# Altium PCB Mixed Signal Board.PcbDoc (part 2 of 3)
Units mm, origin at the board's own origin, x right, y up, seen from the top; angles counter-clockwise.
Board outline 75 x 70 mm, 4 copper layers (Top Layer, GND, VCC, Bottom Layer), stack 1.565 mm thick; 188 components, 143 nets, 738 pads, 413 vias.
Unrouted connection lines stored in the file: 2.
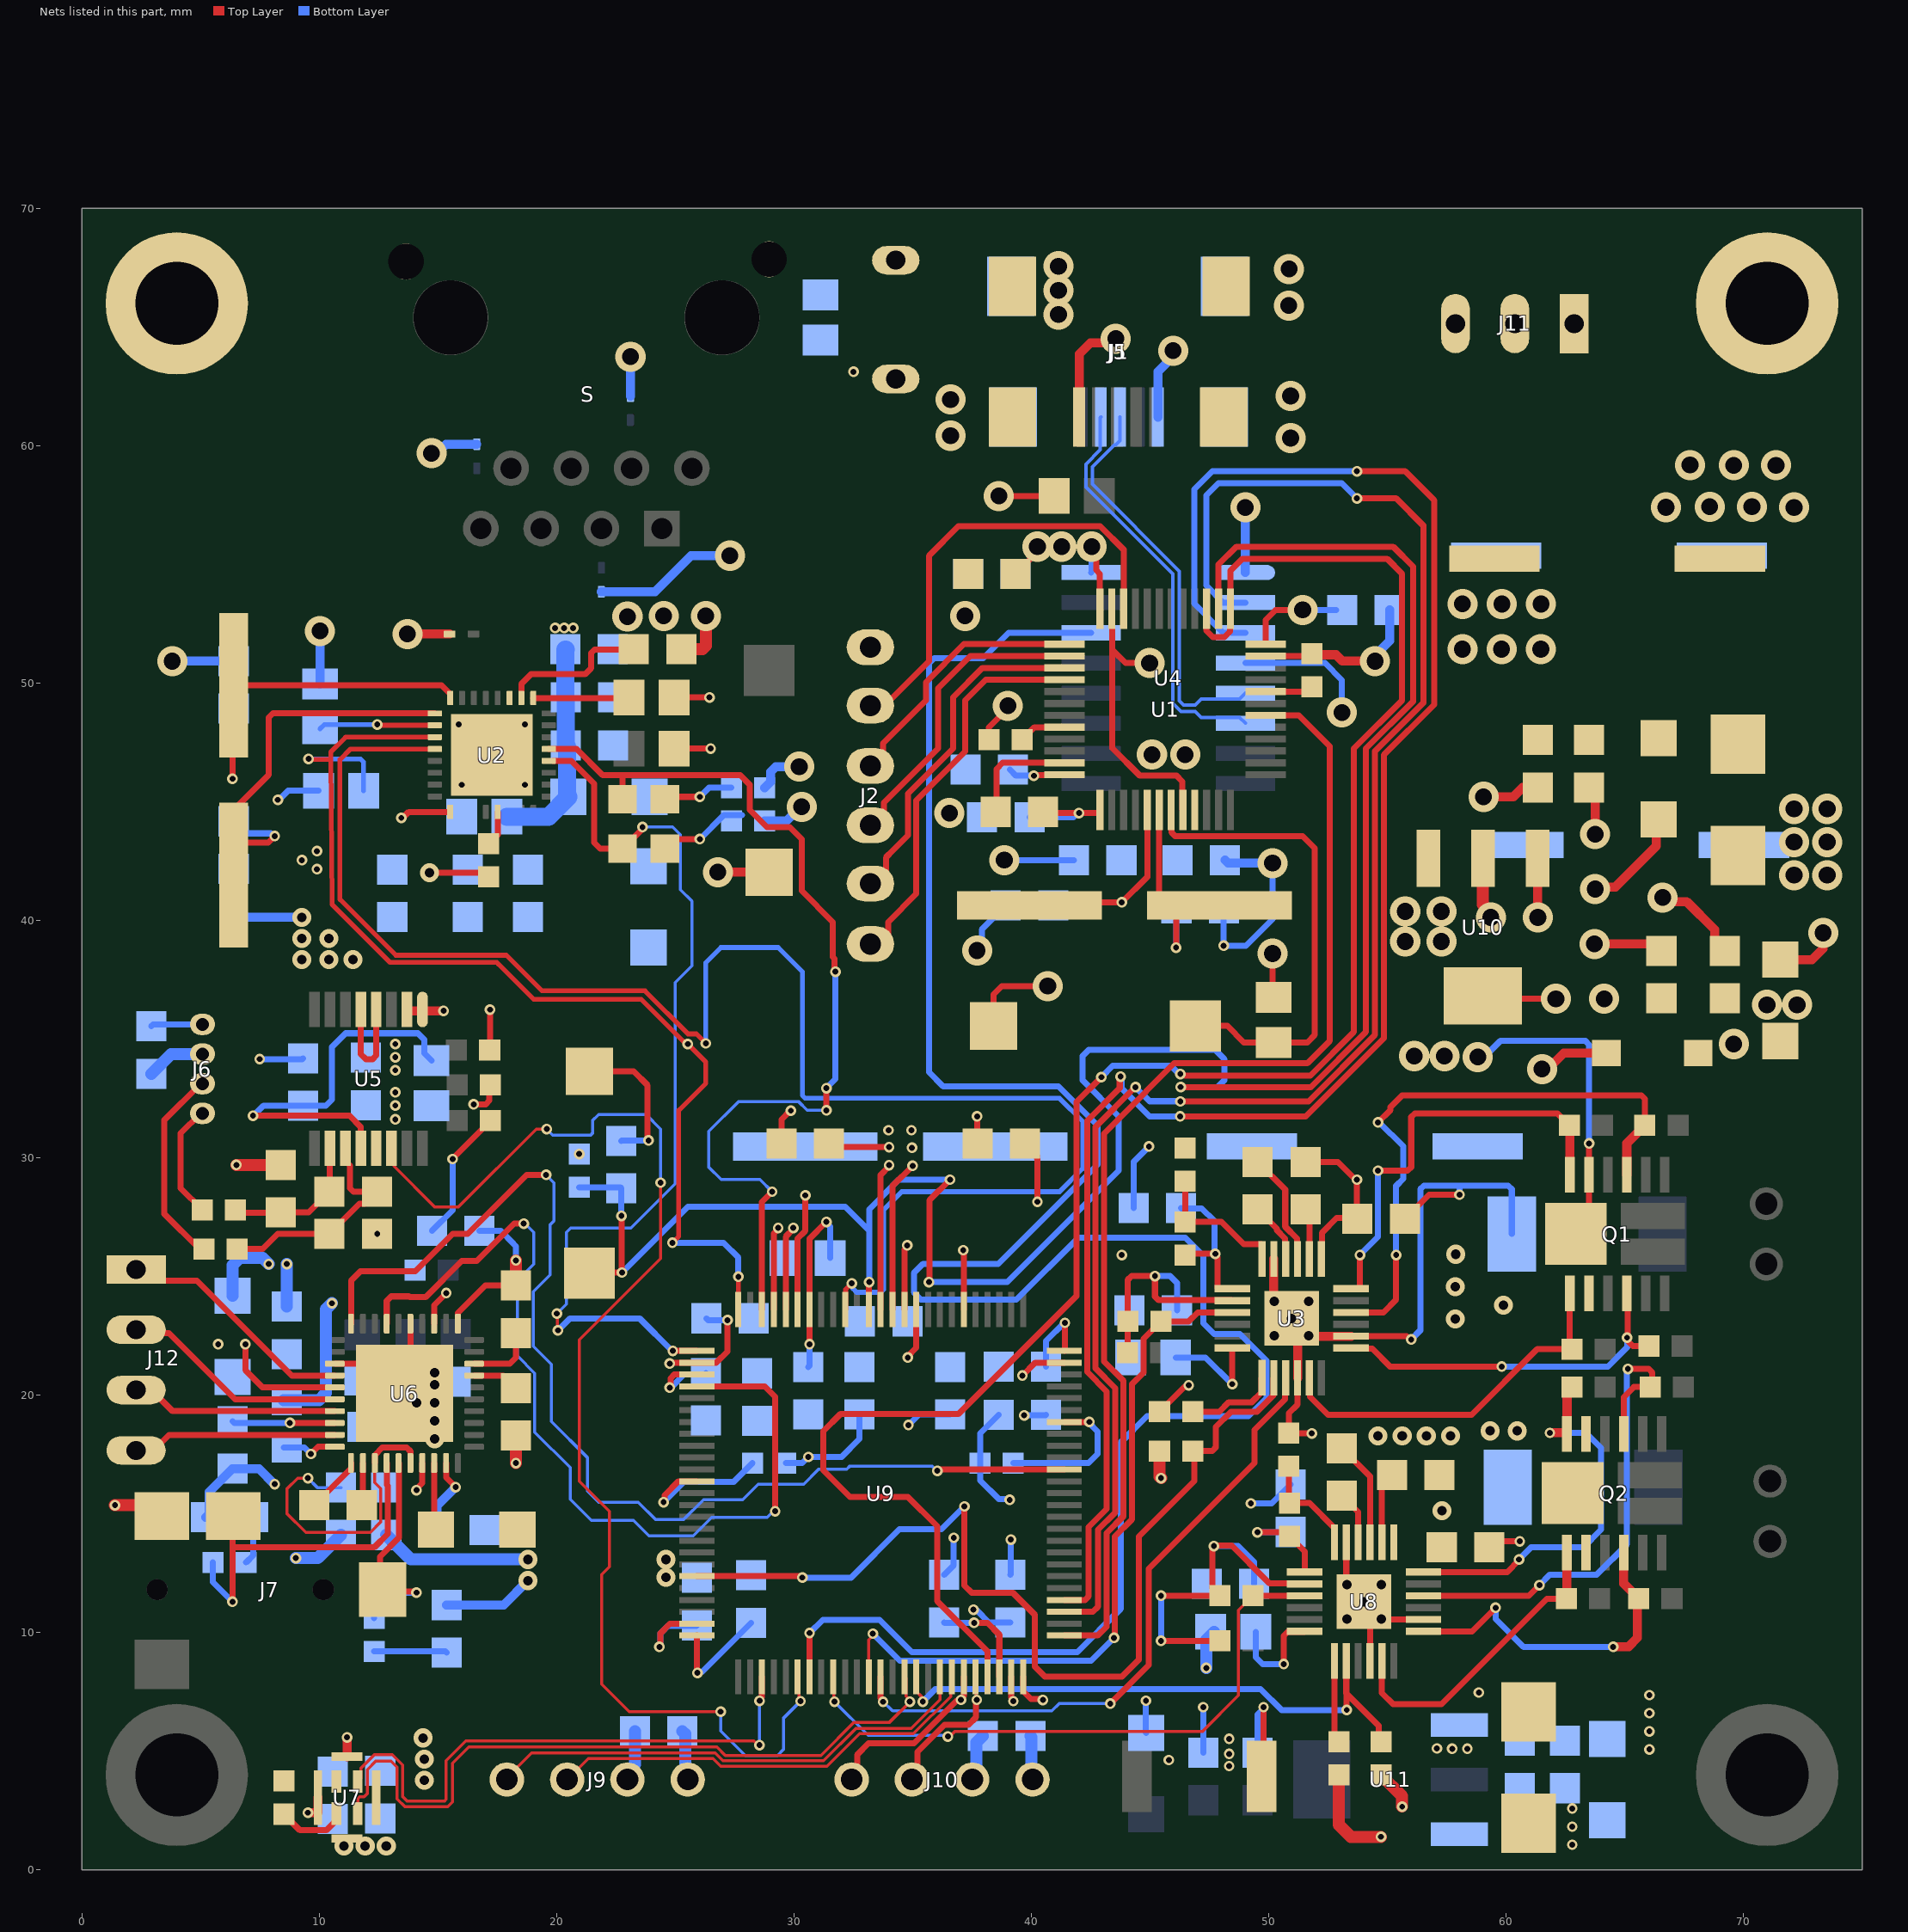
[diagram p4: the nets of this part, all layers, seen from the top]

## Via types
v1: diameter 0.45, hole 0.25, Top Layer to Bottom Layer, 268 vias
v2: diameter 1.27, hole 0.711, Top Layer to Bottom Layer, 82 vias
v3: diameter 0.8, hole 0.4, Top Layer to Bottom Layer, 63 vias

## Nets (pads, with @x,y where several pads share a name; then routed paths per layer and width w, separated by ;. In a path a pad name is that pad's centre, name@x,y a point inside that pad or via, vN(x,y) a via of type N, cw(c..) or ccw(c..) an arc to the next point about the centre after c; other vN are vias at no path point) (continued)
+3V3: C1.2 C2.2 C4.2 C5.2 C7.2 C8.2 C9.2 C16.2 C17.2 C18.2 C19.2 C27.2 C28.2 C33.2 C42.2 C43.2 C44.2 C45.2 C46.1 C47.2 C57.2 C58.2 C60.2 C61.2 C62.2 C63.2 C64.2 C65.2 C72.2 C78.2 C79.2 C80.2 D6.K FB1.1 FB2.1 FB4.1 J6.3 J9.3 J10.3 R1.2 R2.2 R6.2 R8.2 R9.2 R11.2 R21.1 R25.2 R26.2 R27.2 R32.2 R33.1 R42.1 R46.2 U1.1 U1.9 U1.24 U1.36 U1.48 U2.17 U4.4 U4.16 U5.13 U6.5 U6.8 U6.33 U7.1 U9.6 U9.11 U9.19 U9.28 U9.50 U9.75 U9.100 U10.2 U10.4 | length 106.8
  Top Layer w0.254: v1(6.889,22.151) 6.889,21.051 7.61,20.33 U6.5@10.658,20.33 ; v1(8.763,18.836) 8.767,18.832 10.656,18.832 U6.8@10.658,18.83 ; v1(13.462,44.323) 13.515,44.323 13.769,44.577 U2.17@15.519,44.577 ; v3(14.646,42.011) 16.981,42.011 R8.2@17.145,41.846 ; U6.33@14.843,23.015 14.845,23.017 14.845,23.798 v1(15.354,24.308) ; v1(15.621,29.952) 15.621,29.972 16.891,31.242 16.891,31.255 17.196,31.56 R26.2@17.209,31.56 ; v1(16.51,32.258) 17.018,32.258 17.17,32.41 17.17,33.033 R25.2@17.209,33.071 ; R27.2@17.183,34.544 17.196,34.557 v1(17.196,36.246) ; v1(24.765,20.32) 24.803,20.358 24.803,20.717 24.96,20.875 U9.28@25.917,20.875 ; R9.2@24.892,49.403 v1(26.441,49.403) ; R6.2@24.953,47.244 v1(26.492,47.244) ; U9.50@25.917,9.875 25.917,8.322 v1(25.933,8.306) ; v1(30.658,22.149) 30.655,22.152 U9.19@30.655,23.613 30.655,26.594 31.366,27.305 v1(31.369,27.305) ; U9.11@34.655,23.613 34.655,26.144 34.773,26.261 v1(34.773,26.314) ; v1(37.135,26.111) 37.155,26.091 U9.6@37.155,23.613 ; v2(38.633,57.887) R2.2@40.96,57.887 ; C5.2@39.338,54.61 40.259,55.531 v2(40.259,55.753) ; U9.75@39.655,8.137 39.655,7.526 39.981,7.2 40.45,7.2 v1(40.488,7.163) ; v1(40.107,46.101) 40.129,46.123 41.38,46.123 U1.48@41.402,46.145 ; C4.2@40.497,44.577 40.548,44.526 v1(42.012,44.526) 42.867,44.526 42.89,44.549 U1.1@42.89,44.657 ; U9.100@41.393,21.875 41.418,21.875 v1(41.418,23.05) ; v2(42.545,55.753) 42.739,55.559 42.739,54.761 42.89,54.61 U1.36@42.89,53.133 ; R21.1@45.403,19.304 46.483,20.384 46.597,20.384 v1(46.634,20.422) ; U1.24@49.878,51.645 49.878,52.672 50.292,53.086 v2(51.435,53.086) ; v2(50.165,38.608) 50.165,36.811 R1.2@50.212,36.764 ; U10.4@59.03,36.826 59.152,36.703 v2(62.103,36.703)
  Top Layer w0.508: R42.1@52.959,4.001 52.959,1.905 53.467,1.397 v1(54.737,1.397) ; U10.2@59.03,42.626 59.03,40.668 59.36,40.338 v2(59.36,40.132)
  Bottom Layer w0.254: C42.2@6.35,18.907 6.421,18.836 v1(8.763,18.836) ; v1(8.255,45.085) 8.308,45.085 8.689,45.466 R11.2@9.972,45.466 ; C45.2@14.748,26.924 15.621,27.797 v1(15.621,29.952) ; v1(24.765,20.32) 24.817,20.32 25.372,20.875 26.225,20.875 C62.2@26.289,20.939 ; v1(25.933,8.306) 25.971,8.343 26.123,8.343 27.686,9.906 C63.2@28.194,10.414 ; C61.2@30.607,21.193 30.658,21.244 v1(30.658,22.149) ; v1(31.369,27.305) 31.369,27.252 31.521,27.1 FB4.1@31.521,25.781 ; v1(34.823,18.745) 35.271,19.193 C60.2@36.576,19.193 ; v1(37.566,10.963) 37.604,10.926 37.719,10.926 38.215,10.43 C64.2@39.116,10.43 ; C1.2@39.1,46.355 39.354,46.101 v1(40.107,46.101) ; C27.2@39.338,54.61 40.259,55.531 v2(40.259,55.753) ; v1(39.7,19.152) 40.599,19.152 C65.2@40.624,19.177 ; C2.2@39.929,44.348 41.781,44.348 41.959,44.526 v1(42.012,44.526) ; C72.2@40.624,21.209 40.624,22.285 41.389,23.05 v1(41.418,23.05) ; U4.16@42.521,54.661 42.545,54.685 v2(42.545,55.753) ; U4.4@49.021,50.851 52.37,50.851 53.086,50.135 v2(53.086,48.768) ; v2(51.435,53.086) C9.2@52.848,53.086
  Bottom Layer w0.508: C33.2@2.921,33.544 3.754,34.377 J6.3@5.08,34.377 ; J9.3@22.987,3.81 22.987,4.134 23.304,4.451 C57.2@23.304,5.842 ; J10.3@37.512,3.81 37.692,3.99 37.692,5.368 C58.2@37.964,5.639
  other v1: 5.746,22.151 20.955,30.163 13.208,31.623 13.208,32.207 13.208,32.766 9.906,42.164 9.271,42.545 9.906,42.926
  other v2: 69.596,34.798 70.993,36.449 72.263,36.449 64.135,36.703 45.085,46.99 46.482,46.99 41.275,55.753
  other v3: 14.427,3.785 14.427,4.674 14.376,5.563
+12V: C23.2 C24.2 C53.2 C54.2 C75.1 C76.1 C77.1 C90.1 D5.A D7.A J11.1 Q1.2 Q1.11 Q1.15 Q2.2 Q2.11 Q2.15 U3.1 U8.1 | length 20.3
  Top Layer w0.254: C23.2@51.562,29.829 52.922,29.829 53.668,29.083 v1(53.721,29.083) 53.721,27.448 C24.2@53.737,27.432 ; U3.1@52.217,25.737 52.24,25.76 52.24,26.84 52.87,27.47 53.648,27.47 C24.2@53.737,27.559 ; Q1.15@62.94,26.797 63.49,27.347 Q1.11@63.49,29.297 63.495,29.302 63.495,30.602 v1(63.5,30.607)
  Bottom Layer w0.254: v2(58.81,34.253) 59.085,34.253 59.757,34.925 63.351,34.925 63.5,34.776 v1(63.5,30.607)
  other v1: 66.04,5.08 66.04,5.842 66.04,6.604 66.04,7.366
  other v2: 56.134,34.29 57.404,34.29 72.136,41.91 73.533,41.91 72.136,43.307 73.533,43.307 72.136,44.704 73.533,44.704 66.737,57.412 72.136,57.404 68.583,57.436 70.361,57.436 67.753,59.19 69.596,59.182 71.374,59.182
  other v3: 57.302,15.138 54.61,18.288 55.626,18.288 56.642,18.288 57.658,18.288 57.861,23.216 59.893,23.8 57.859,24.568 57.884,25.94
AIN0: J6.2 R28.2 | length 8.5
  Top Layer w0.254: J6.2@5.08,33.127 5.005,33.127 3.48,31.602 3.48,27.635 4.953,26.162 R28.2@5.143,26.162
AIN1: J6.1 R29.2 | length 4.9
  Top Layer w0.254: R29.2@5.08,27.813 4.166,28.727 4.166,31.038 5.005,31.877 J6.1@5.08,31.877
CAN_RX: J10.1 U9.70 | length 7.5
  Top Layer w0.254: J10.1@32.432,3.81 32.661,4.039 32.661,4.848 33.147,5.334 35.059,5.334 36.855,7.13 37.001,7.13 v1(37.039,7.167) 37.039,7.22 37.155,7.337 U9.70@37.155,8.137
CAN_TX: J10.2 U9.71 | length 6.1
  Top Layer w0.127: U9.71@37.655,8.137 37.68,8.112 37.68,7.192 v1(37.704,7.167)
  Top Layer w0.254: J10.2@34.972,3.81 35.201,4.039 35.201,4.975 36.344,6.118 37.36,6.118 37.676,6.434 37.676,7.14 v1(37.704,7.167)
CH340_RST: U4.14 U9.57 | length 96.6
  Top Layer w0.254: U9.57@30.655,8.137 30.655,9.979 v1(30.658,9.982)
  Bottom Layer w0.254: v1(30.658,9.982) 31.217,10.541 33.604,10.541 34.971,9.175 41.941,9.175 43.764,10.998 43.764,18.009 44.882,19.126 49.149,19.126 49.911,19.888 49.911,21.463 48.793,22.581 47.701,22.581 47.244,23.038 47.244,25.883 46.482,26.645 41.986,26.645 39.37,24.028 35.357,24.028 35.052,24.333 35.052,25.146 35.433,25.527 38.608,25.527 42.799,29.718 42.799,31.369 41.148,33.02 36.284,33.02 35.689,33.615 35.689,50.836 35.907,51.054 37.973,51.054 39.04,52.121 U4.14@42.521,52.121
CH340_RXD: U4.3 U9.79 | length 79.6
  Top Layer w0.254: U9.79@41.393,11.375 42.269,11.375 42.418,11.524 42.418,14.441 43.18,15.203 43.18,20.157 42.358,20.979 42.358,31.571 43.727,32.94 43.727,33.389 v1(43.764,33.426) ; v1(46.271,31.748) 46.273,31.75 51.562,31.75 54.86,35.048 54.86,46.986 56.972,49.098 56.972,57.709 55.753,58.928 v1(53.721,58.928)
  Bottom Layer w0.254: v1(43.764,33.426) 43.802,33.389 43.802,32.931 44.984,31.748 v1(46.271,31.748) ; U4.3@49.021,52.121 48.088,52.121 46.863,53.347 46.863,58.166 47.625,58.928 v1(53.721,58.928)
CH340_TXD: U4.2 U9.78 | length 74.4
  Top Layer w0.254: U9.78@41.393,10.875 42.6,10.875 42.814,11.09 42.814,14.337 43.534,15.057 43.534,20.304 42.712,21.126 42.712,31.315 44.376,32.98 v1(44.392,32.98) ; v1(46.279,32.379) 51.683,32.379 54.483,35.179 54.483,47.132 56.515,49.164 56.515,56.642 55.372,57.785 v1(53.721,57.785)
  Bottom Layer w0.254: v1(44.392,32.98) 44.392,32.976 44.98,32.388 v1@46.27,32.388 ; U4.2@49.021,53.391 48.088,53.391 47.371,54.109 47.371,57.912 47.879,58.42 53.086,58.42 v1(53.721,57.785)
CH340USB_D_N: J5.2 U4.6 | length 17.2
  Bottom Layer w0.146: J5.2@42.933,61.214 42.906,61.187 42.906,59.831 42.298,59.222 42.298,58.27 45.962,54.607 45.962,49.152 46.305,48.809 46.907,48.809 47.161,48.556 48.776,48.556 U4.6@49.021,48.311
CH340USB_D_P: J5.3 U4.5 | length 17
  Bottom Layer w0.146: J5.3@43.733,61.214 43.733,60.214 43.556,60.037 43.5,60.037 42.572,59.109 42.572,58.384 46.236,54.72 46.236,49.266 46.418,49.083 46.907,49.083 47.161,49.337 48.776,49.337 U4.5@49.021,49.581
CLK_MIC: U7.3 U9.65 | length 30.9
  Top Layer w0.127: U7.3@11.626,2.373 11.626,3.01 11.7,3.084 11.894,3.084 12.026,3.217 12.026,4.229 12.382,4.585 13.026,4.585 13.284,4.327 13.284,2.997 13.614,2.667 15.418,2.667 15.621,2.87 15.621,4.496 16.307,5.182 26.753,5.182 27.109,4.825 31.14,4.825 32.537,6.223 34.028,6.223 34.881,7.076 v1(34.881,7.092) ; U9.65@34.655,8.137 34.719,8.073 34.719,7.317 34.876,7.159 v1@34.876,7.092
COL: DS1.A U2.28 U9.26 | length 40.5
  Top Layer w0.127: v1(20.013,23.441) 20.035,23.419 20.035,22.755 v1(20.057,22.733)
  Top Layer w0.254: U2.28@19.842,46.727 20.629,46.727 21.59,45.766 21.59,43.282 21.844,43.028 DS1.A@22.784,43.028 23.584,43.828 23.584,43.904 v1(23.622,43.942) ; v1(24.898,21.87) 24.904,21.875 U9.26@25.917,21.875
  Bottom Layer w0.127: v1(20.013,23.441) 20.412,23.841 20.412,26.864 20.599,27.051 23.139,27.051 24.994,28.905 24.994,37.389 25.705,38.1 25.705,40.818 25.222,41.3 25.222,43.612 24.892,43.942 v1(23.622,43.942)
  Bottom Layer w0.254: v1(20.057,22.733) 20.565,23.241 23.495,23.241 24.866,21.87 v1(24.898,21.87)
CRS: DS2.A U2.29 U9.23 | length 41.4
  Top Layer w0.254: U2.29@19.669,47.227 20.837,47.227 21.938,46.126 22.784,46.126 ; DS2.A@22.784,45.11 22.784,46.126 ; U9.23@28.655,23.613 28.655,28.146 v1(29.083,28.575) ; v1(31.369,32.004) v1(31.369,32.938) ; v1(31.75,37.846) 31.712,37.884 31.712,38.393 31.642,38.463 31.642,39.935 30.328,41.25 30.328,43.434 29.832,43.929 28.867,43.929 28.143,44.653 28.143,45.72 27.737,46.126 22.784,46.126
  Bottom Layer w0.127: v1(29.083,28.575) 28.567,29.091 26.932,29.091 26.416,29.606 26.416,31.115 27.678,32.377 30.189,32.377 30.563,32.004 v1(31.369,32.004)
  Bottom Layer w0.254: v1(31.369,32.938) 31.75,33.319 v1(31.75,37.846)
DOUT_MIC: U7.4 U9.53 | length 24.2
  Top Layer w0.127: U7.4@11.626,3.723 11.762,3.859 11.762,4.287 12.327,4.851 13.081,4.851 13.511,4.421 13.511,3.091 13.708,2.894 15.267,2.894 15.342,2.968 15.342,4.599 16.178,5.436 28.314,5.436 28.492,5.258 v1(28.55,5.258)
  Top Layer w0.254: v1(28.552,7.126) 28.552,7.179 28.655,7.282 U9.53@28.655,8.137
  Bottom Layer w0.127: v1(28.55,5.258) 28.55,7.124 v1(28.552,7.126)
DRDY: U5.14 U9.56 | length 53.5
  Top Layer w0.127: U5.14@13.051,30.404 13.149,30.306 13.149,29.65 14.859,27.94 15.875,27.94 19.152,31.217 v1(19.587,31.217) ; v1(24.384,28.956) 24.383,25.761 20.955,22.333 20.955,16.383 22.225,15.113 22.225,12.769 21.9,12.444 21.9,7.822 23.054,6.668 v1(26.916,6.668) ; U9.56@30.155,8.137 30.218,8.073 30.216,8.071 30.216,7.173 v1(30.277,7.112)
  Bottom Layer w0.127: v1(19.587,31.217) 19.841,30.963 21.439,30.963 21.514,31.037 21.514,31.572 21.768,31.826 23.774,31.826 24.384,31.217 v1(24.384,28.956) ; v1(26.916,6.668) 26.916,5.85 27.948,4.818 29.304,4.818 29.554,5.069 29.554,6.39 v1(30.277,7.112)
DVDD: C26.2 R22.2 R23.2 U3.8 | length 10.7
  Top Layer w0.254: R22.2@44.056,21.793 44.069,21.806 R23.2@44.069,23.114 44.069,24.87 44.218,25.019 v1(45.212,25.019) 45.212,24.152 45.361,24.003 48.451,24.003 U3.8@48.467,23.987
  Bottom Layer w0.254: v1(45.212,25.019) 45.847,25.019 46.136,24.73 C26.2@46.136,23.571
DVDD_2: C56.2 R43.2 R44.2 U8.8 | length 16.6
  Top Layer w0.254: v1(45.466,9.652) R43.2@47.942,9.652 ; v1(45.466,11.557) R44.2@47.942,11.557 47.625,11.874 47.625,13.527 47.655,13.557 47.655,13.634 47.625,13.664 48.439,13.664 49.875,12.228 49.878,12.228 50.03,12.076 51.499,12.076 U8.8@51.522,12.053
  Bottom Layer w0.254: v1(45.466,9.652) v1(45.466,11.557) ; v1(47.693,13.648) 48.723,13.648 49.387,12.984 C56.2@49.387,12.065
EARTH: C21.1 J11.2 MH1.1 MH4.1 R10.1
EN: R24.2 U3.14 U9.45 | length 41.8
  Top Layer w0.254: U9.45@25.917,12.375 30.244,12.375 30.3,12.319 v1(30.353,12.319) ; v1(37.186,15.316) 37.186,11.983 37.485,11.684 39.218,11.684 40.157,10.744 40.157,8.56 40.564,8.153 43.819,8.153 44.526,8.86 44.526,14.046 46.863,16.383 46.863,17.59 R24.2@46.8,17.653 47.625,17.653 47.779,17.807 47.779,18.667 48.417,19.305 49.506,19.305 50.194,19.993 50.194,20.71 U3.14@50.217,20.733
  Bottom Layer w0.254: v1(30.353,12.319) 32.41,12.319 34.442,14.351 36.22,14.351 v1(37.186,15.316)
EN_2: R45.2 U8.14 U9.66 | length 24.3
  Top Layer w0.127: U9.66@35.155,8.137 35.155,7.526 35.37,7.312 35.37,7.151 v1(35.431,7.089)
  Top Layer w0.254: U8.14@53.272,8.799 53.272,7.434 ; v1(53.289,6.741) 53.289,7.417 53.272,7.434 ; R45.2@54.737,5.398 54.632,5.503 54.632,6.074 53.272,7.434
  Bottom Layer w0.254: v1(35.431,7.089) 35.431,7.096 35.955,7.619 49.662,7.619 50.54,6.741 v1(53.289,6.741)
EXT_UART_RX: J9.1 U9.68 | length 20.8
  Top Layer w0.127: J9.1@17.954,3.937 18.942,4.925 26.688,4.925 27.015,4.598 31.243,4.598 32.614,5.969 34.944,5.969 36.155,7.18 U9.68@36.155,8.137
EXT_UART_TX: J9.2 U9.69 | length 18.6
  Top Layer w0.127: J9.2@20.494,3.937 20.574,3.937 21.335,4.698 26.594,4.698 26.921,4.372 31.397,4.372 32.768,5.742 35.038,5.742 36.604,7.308 36.604,8.086 U9.69@36.655,8.137
GH1: Q1.1 R16.1 U3.17 | length 15.7
  Top Layer w0.254: U3.17@51.717,20.733 51.74,20.71 51.74,19.935 52.498,19.177 58.547,19.177 61.316,21.946 R16.1@62.776,21.946 ; R16.1@62.69,21.923 Q1.1@62.69,24.297
GH1_2: Q2.1 R37.1 U8.17 | length 13.1
  Top Layer w0.254: U8.17@54.772,8.799 54.772,7.458 55.245,6.985 57.277,6.985 61.722,11.43 R37.1@62.548,11.43
  Top Layer w0.381: R37.1@62.548,11.43 62.555,11.438 62.555,13.367 Q2.1@62.563,13.375
GH2: Q1.12 R15.1 U3.24 | length 18.3
  Top Layer w0.254: U3.24@53.467,24.487 53.825,24.487 53.848,24.51 v1(53.848,25.908) ; v1(54.61,29.464) 55.858,29.464 56.007,29.613 56.007,31.728 56.156,31.877 62.167,31.877 R15.1@62.675,31.369
  Top Layer w0.381: R15.1@62.675,31.369 62.682,31.361 62.682,29.305 Q1.12@62.69,29.297
  Bottom Layer w0.254: v1(53.848,25.908) 54.61,26.67 v1(54.61,29.464)
GH2_2: Q2.12 R36.1 U8.24 | length 16.9
  Top Layer w0.254: U8.24@56.522,12.553 60.049,12.553 60.545,13.049 v1(60.545,13.08)
  Top Layer w0.381: v1(61.849,18.415) 62.553,18.415 62.563,18.406 Q2.12@62.563,18.375 62.572,18.384 62.572,20.142 R36.1@62.776,20.345
  Bottom Layer w0.254: v1(60.545,13.08) 61.054,13.589 63.256,13.589 64.008,14.341 64.008,17.78 63.373,18.415 v1(61.849,18.415)
GL1: Q1.4 R19.1 U3.19 | length 15.7
  Top Layer w0.254: U3.19@53.467,21.987 53.49,21.964 54.363,21.964 55.118,21.209 59.817,21.209 v1(59.819,21.207) ; Q1.4@65.09,24.297 65.12,24.266 v1@65.12,22.428 ; v1(65.1,22.428) 65.138,22.391 65.138,22.274 65.34,22.073 R19.1@66.027,22.073
  Bottom Layer w0.254: v1@59.823,21.211 59.827,21.207 64.291,21.207 65.1,22.016 v1@65.1,22.418
GL1_2: Q2.4 R40.1 U8.19 | length 14.4
  Top Layer w0.254: U8.19@56.522,10.053 58.567,10.053 v1(59.563,11.049)
  Top Layer w0.381: v1(64.516,9.398) 64.529,9.411 65.164,9.411 65.532,9.779 65.532,11.366 R40.1@65.596,11.43 64.963,12.063 Q2.4@64.963,13.375
  Bottom Layer w0.254: v1(59.563,11.049) 59.563,10.57 60.735,9.398 v1(64.516,9.398)
GL2: Q1.9 R17.1 U3.22 | length 25.5
  Top Layer w0.254: U3.22@53.467,23.487 54.834,23.487 55.372,24.025 v1(55.372,25.908) ; v1(54.61,31.496) 55.137,32.023 55.137,32.15 55.626,32.639 65.701,32.639 65.85,32.49 R17.1@65.85,31.369
  Top Layer w0.381: Q1.9@65.09,29.297 65.09,30.609 R17.1@65.85,31.369
  Bottom Layer w0.254: v1(54.61,31.496) 54.663,31.496 55.67,30.489 55.67,29.12 55.372,28.822 v1(55.372,25.908)
GL2_2: Q2.9 R38.1 U8.22 | length 22.1
  Top Layer w0.254: U8.22@56.522,11.553 60.96,11.553 v1(61.407,11.999) ; Q2.9@64.963,18.375 64.963,19.911 65.397,20.345 R38.1@66.078,20.345 ; v1(65.135,21.108) 66.014,21.108 66.167,20.955 66.167,20.434 R38.1@66.078,20.345 ; 65.383,20.345 R38.1@66.078,20.345
  Bottom Layer w0.254: v1(61.407,11.999) 61.853,12.446 63.828,12.446 65.098,13.716 65.098,21.072 v1(65.135,21.108)
GND: C1.1 C2.1 C3.2 C4.1 C5.1 C6.2 C7.1 C8.1 C9.1 C10.1 C11.1 C12.1 C13.1 C14.1 C15.1 C16.1 C17.1 C18.1 C19.1 C20.1 C24.1 C25.1 C26.1 C27.1 C28.1 C29.1 C31.2 C32.2 C33.1 C34.2 C35.1 C36.1 C37.1 C39.1 C40.2 C41.1 C42.1 C43.1 C44.1 C45.1 C46.2 C47.1 C48.2 C49.2 C50.2 C51.2 C54.1 C55.1 C56.1 C57.1 C58.1 C59.1 C60.1 C61.1 C62.1 C63.1 C64.1 C65.1 C66.1 C67.1 C68.1 C69.1 C70.1 C71.1 C72.1 C73.2 C74.2 C75.2 C76.2 C77.2 C78.1 C79.1 C80.1 C81.1 C82.1 C83.1 C84.1 C85.1 C86.1 C87.1 C88.1 C89.1 C90.2 C91.2 D1.A D2.A D3.A D4.A D6.A D8.A J1.5 J1.6 J2.6 J5.5 J5.6 J6.4 J7.1 J9.4 J10.4 J11.3 R3.2 R4.2 R5.2 R7.2 R12.1 R14.2 R18.1 R20.1 R24.1 R35.2 R39.1 R41.1 R45.1 R47.1 R48.1 SW1.1 SW2.1 SW3.1 U1.8 U1.23 U1.35 U1.47 U2.33 U3.5 U3.16 U3.20 U3.25 U4.1 U5.1 U5.2 U5.4 U5.5 U6.3 U6.17 U6.31 U6.35 U6.41 U7.5 U8.5 U8.16 U8.20 U8.25 U9.10 U9.20 U9.27 U9.74 U9.99 U10.1 U11.1 | length 279.9
  Top Layer w0.254: U6.3@10.658,21.33 14.484,21.33 v3(14.859,20.955) 13.843,21.971 U6.35@13.843,23.015 ; U5.5@11.751,36.254 11.751,34.375 11.963,34.163 12.252,34.163 12.401,34.312 U5.4@12.401,36.254 ; v1(14.097,16.002) 14.097,16.055 14.343,16.301 U6.17@14.343,17.145 ; U6.31@15.843,23.015 15.843,23.463 17.002,24.622 C49.2@18.288,24.622 ; SW3.1@21.387,33.646 23.25,33.646 23.838,33.058 23.838,30.772 v1(23.876,30.734) ; v1(24.765,21.336) 24.818,21.336 24.857,21.375 26.734,21.375 27.203,21.844 v1(27.203,23.165) ; C74.2@29.48,30.607 29.48,31.623 29.846,31.989 v1(29.87,31.989) ; U9.20@30.155,23.613 30.155,26.595 30.48,26.92 v1(30.48,28.423) ; v1(34.798,21.59) 34.798,21.643 35.155,22 U9.10@35.155,23.613 ; R3.2@38.214,47.625 38.21,47.629 38.21,48.133 39.014,48.937 v2(39.014,49.047) ; SW1.1@38.41,35.56 38.41,36.886 38.76,37.236 v2(40.691,37.236) ; C4.1@38.497,44.577 38.532,44.612 38.532,46.38 38.796,46.645 U1.47@41.402,46.645 ; U9.74@39.155,8.137 39.155,7.253 39.243,7.165 v1(39.243,7.112) ; v1(39.624,20.828) 40.171,21.375 U9.99@41.393,21.375 ; C73.2@39.735,30.607 40.243,30.099 40.243,29.966 40.259,29.95 v1(40.259,28.149) ; U1.35@43.39,53.133 43.413,53.11 43.413,51.405 ; v2(44.983,50.851) 43.967,50.851 43.413,51.405 ; U1.8@46.39,44.657 46.367,44.68 46.367,45.86 46.126,46.101 44.577,46.101 43.413,47.265 43.413,51.405 ; D8.A@49.7,3.937 49.784,4.021 v1(49.784,6.858) ; U1.23@49.878,51.145 51.716,51.145 R4.2@51.816,51.245 ; U3.16@51.217,20.733 51.209,20.725 51.209,19.602 50.851,19.243 R35.2@50.851,18.402 50.864,18.39 v1(51.816,18.39) ; U8.5@53.272,13.803 53.272,12.053 v3(53.297,12.028) ; U3.20@53.467,22.487 55.819,22.487 55.954,22.352 v1(56.007,22.352) ; U8.16@54.272,8.799 54.272,10.28 U8.25@54.57,10.578 ; C24.1@55.737,27.432 56.753,28.448 v1(58.039,28.448) ; U8.20@56.522,10.553 54.772,10.553 v3(54.747,10.578) ; C54.1@59.293,13.589 59.547,13.843 v1(60.579,13.843) ; v3(53.297,10.578) U8.25@54.57,10.578 ; v3(53.297,10.578) v3(53.297,12.028) ; v3(53.297,10.578) v3(54.022,11.303) ; v3(53.297,12.028) v3(54.747,12.028) ; v3(53.297,12.028) v3(54.022,11.303) ; v3(54.022,11.303) v3(54.747,10.578) ; v3(54.022,11.303) v3(54.747,12.028) ; U8.25@54.57,10.578 v3(54.747,10.578) ; v3(54.747,10.578) v3(54.747,12.028)
  Top Layer w0.381: v1(9.525,2.413) 9.936,2.413 9.951,2.428 U7.5@9.951,3.048 ; U7.5@11.176,4.773 v1(11.176,5.588) ; U5.2@13.701,36.254 13.701,36.23 13.735,36.195 v1(15.24,36.195) ; v2(13.716,52.07) D1.A@15.494,52.07 ; v2(26.797,42.037) SW2.1@28.956,42.037 ; J1.5@42.012,61.214 42.025,61.226 42.025,63.869 42.502,64.346 43.391,64.346 v2(43.561,64.516) ; U3.5@50.217,25.737 50.217,23.987 v3(50.242,23.962) ; U3.16@51.217,20.733 U3.25@51.217,22.512 ; R4.2@51.816,51.245 51.863,51.198 52.832,51.198 53.103,50.927 v2(54.483,50.927) ; U3.20@53.467,22.487 51.717,22.487 v3(51.692,22.512) ; v2(59.055,45.212) 60.309,45.212 C83.1@60.706,45.609 ; U10.1@61.33,42.626 61.335,42.62 61.335,40.138 v2(61.341,40.132) ; v2(61.519,33.744) 61.759,33.744 62.438,34.423 D6.A@64.23,34.423 ; C82.1@63.5,45.609 63.754,45.355 v2(63.754,43.637) ; v2(63.729,39.014) 66.253,39.014 C80.1@66.548,38.719 ; v2(63.754,41.326) 63.845,41.417 64.607,41.417 66.34,43.149 66.34,44.173 C81.1@66.426,44.26 ; v2(66.599,40.97) 66.769,40.8 67.607,40.8 68.794,39.614 68.794,39.14 C79.1@69.215,38.719 ; C78.1@71.56,38.354 72.893,38.354 73.363,38.824 v2(73.363,39.479) ; v3(50.242,22.512) v3(50.967,23.237) ; v3(50.242,22.512) U3.25@51.217,22.512 ; v3(50.242,22.512) v3(50.242,23.962) ; v3(50.242,23.962) v3(51.692,23.962) ; v3(50.242,23.962) v3(50.967,23.237) ; v3(50.967,23.237) v3(51.692,23.962) ; v3(50.967,23.237) v3(51.692,22.512) ; U3.25@51.217,22.512 v3(51.692,22.512) ; v3(51.692,22.512) v3(51.692,23.962)
  Top Layer w0.508: v1(1.397,15.367) 2.919,15.367 J7.1@3.375,14.911 ; v1(6.509,29.702) C31.2@8.382,29.702 ; v1(18.288,17.145) C48.2@18.288,18.304 ; C49.2@18.288,24.622 v1(18.288,25.679) ; C10.1@25.257,51.435 26.14,51.435 26.289,51.584 v2(26.289,52.832) ; R24.1@45.403,17.653 45.403,16.573 v1(45.466,16.51) ; R45.1@54.737,4.001 55.626,3.112 v1(55.626,2.667)
  Bottom Layer w0.254: C33.1@2.921,35.544 3.004,35.627 J6.4@5.08,35.627 ; v1(7.493,34.163) 9.287,34.163 C29.1@9.322,34.198 ; C45.1@16.748,26.924 17.653,26.924 18.203,26.374 18.203,26.364 18.288,26.279 v1(18.288,25.679) ; C59.1@22.733,30.718 22.749,30.734 v1(23.876,30.734) ; C68.1@26.305,23.241 26.381,23.165 v1(27.203,23.165) ; R47.1@29.654,17.145 30.353,17.145 v1(30.607,17.399) 32.008,17.399 32.766,18.157 C71.1@32.766,19.193 ; C66.1@36.322,12.43 36.734,12.842 v1(36.734,13.995) ; v2(37.719,38.735) 37.913,38.929 37.913,39.629 C3.2@38.925,40.64 ; C65.1@38.624,19.177 37.846,18.399 37.846,16.408 38.621,15.633 39.053,15.633 v1(39.091,15.596) ; v2(38.862,42.545) C7.1@41.799,42.545 ; C64.1@39.116,12.43 39.141,12.455 v1(39.141,13.919) ; C25.1@44.314,27.889 44.314,29.836 v1(44.958,30.48) ; v1(44.831,7.13) 44.831,5.783 C84.1@44.836,5.778 ; C85.1@47.244,4.937 v1(47.244,6.858) ; C6.2@48.117,40.513 48.108,40.503 v1(48.108,38.938) 49.047,38.938 50.165,40.056 v2(50.165,42.418) ; v1(49.251,15.443) 50.13,15.443 C55.1@50.927,16.24 ; C86.1@49.53,4.937 49.53,6.551 49.784,6.805 v1(49.784,6.858) ; v1(56.007,22.352) 56.388,22.733 56.388,28.68 56.537,28.829 58.039,28.829 ; v1(58.039,28.448) 58.039,28.829 ; R20.1@60.245,26.797 60.245,28.68 60.096,28.829 58.039,28.829
  Bottom Layer w0.381: v2(3.81,50.927) C15.1@6.397,50.927 ; C34.2@5.223,14.859 5.367,15.003 5.367,15.924 C42.1@6.35,16.907 7.458,16.907 8.109,16.256 v1(8.128,16.256) ; C20.1@6.397,42.18 6.397,40.482 6.747,40.132 v3(9.271,40.132) ; R12.1@10.033,49.972 v2(10.033,52.197) ; v2(14.732,59.69) 14.973,59.69 15.351,60.068 D2.A@16.637,60.068 ; C91.2@15.367,11.16 17.764,11.16 v3(18.796,12.192) ; D3.A@21.891,53.851 24.146,53.851 25.667,55.372 v2(27.305,55.372) ; D4.A@23.114,62.097 v2(23.114,63.754) ; R5.2@28.766,44.196 29.693,44.196 30.289,44.792 v2(30.327,44.792) ; R7.2@28.766,45.593 29.02,45.847 29.02,46.259 29.243,46.482 v2(30.226,46.482) ; J5.5@45.333,61.214 45.333,63.126 45.974,63.767 v2(45.974,64.008) ; C8.1@48.163,42.545 48.29,42.418 v2(50.165,42.418) ; U4.1@49.021,54.661 49.022,54.662 v2(49.022,57.404) ; v2(54.483,50.927) 54.483,51.168 55.102,51.786 C9.1@55.102,53.086
  Bottom Layer w0.508: C43.1@6.355,24.193 6.355,25.483 6.653,25.781 7.62,25.781 v1(7.874,25.527) ; C41.1@8.509,19.796 9.989,19.796 10.287,20.093 10.287,23.622 v1(10.541,23.876) ; C44.1@8.636,23.733 v1(8.636,25.527) ; v1(9.017,13.137) 9.946,13.137 C39.1@10.922,14.113 ; C40.2@12.827,14.113 13.859,13.081 v3(18.796,13.081) ; C57.1@25.304,5.842 25.415,5.731 25.415,3.922 J9.4@25.527,3.81 ; C58.1@39.964,5.639 40.008,5.595 40.008,3.854 J10.4@40.052,3.81 ; v1(47.371,8.509) 47.371,9.701 R39.1@47.703,10.033
  other v1: 48.337,4.378 45.797,4.632 48.337,4.886 57.734,5.105 58.369,5.105 57.087,5.12 48.337,5.521 58.853,7.476 43.815,25.908 12.446,26.797 13.208,33.692 13.208,34.239 13.208,34.798 16.002,45.72 18.669,45.72 15.875,48.26 18.669,48.26
  other v2: 55.753,39.116 57.277,39.116 55.753,40.386 57.277,40.386 36.551,44.526 58.166,51.435 59.817,51.435 61.468,51.435 22.987,52.805 24.511,52.832 37.211,52.832 58.166,53.34 59.822,53.334 61.473,53.334 50.927,60.325 36.601,60.427 36.601,61.951 50.927,62.103 41.148,65.532 50.851,65.913 41.148,66.548 50.858,67.45 41.148,67.564
  other v3: 11.049,1.016 11.938,1.016 12.827,1.016 24.613,12.322 24.613,13.081 14.859,18.161 59.335,18.498 60.478,18.498 14.859,18.923 14.097,19.685 14.859,19.685 14.859,20.447 9.271,38.354 10.414,38.354 11.43,38.354 9.271,39.243 10.414,39.243
INT: R8.1 U2.21 | length 1.5
  Top Layer w0.254: R8.1@17.145,43.243 17.519,43.618 U2.21@17.519,44.577
JTCK/SWCLK_F103: J2.4 U1.37 | length 10.9
  Top Layer w0.254: J2.4@33.575,46.489 33.755,46.669 33.755,47.471 35.56,49.276 35.56,50.038 37.167,51.645 U1.37@41.402,51.645
JTCLK_F407: U1.18 U9.76 | length 50.1
  Top Layer w0.254: U9.76@41.393,9.875 42.793,9.875 43.168,10.25 43.168,14.19 43.888,14.91 43.888,20.603 43.066,21.425 43.066,31.014 44.844,32.792 44.844,32.809 46.022,33.987 51.64,33.987 52.578,34.925 52.578,47.342 51.275,48.645 U1.18@49.878,48.645
JTDI_103: J2.3 U1.38 | length 12.7
  Top Layer w0.254: J2.3@33.575,43.989 33.795,44.209 33.795,44.971 36.068,47.244 36.068,49.784 37.429,51.145 U1.38@41.402,51.145
JTDO_F103: J2.2 U1.39 | length 14.4
  Top Layer w0.254: J2.2@33.575,41.529 33.875,41.829 33.875,42.658 34.179,42.962 34.802,43.584 34.802,45.343 36.703,47.244 36.703,49.403 37.945,50.645 U1.39@41.402,50.645
JTMS/SWDIO_F103: J2.5 U1.34 | length 19
  Top Layer w0.254: J2.5@33.575,49.029 33.789,49.029 35.687,50.927 35.687,55.372 36.932,56.617 42.9,56.617 43.89,55.627 U1.34@43.89,53.133
LRCK: U6.40 U9.90 | length 48.3
  Top Layer w0.254: U6.40@11.343,23.015 11.343,24.83 11.74,25.227 14.051,25.227 15.621,26.797 16.256,26.797 18.745,29.286 v1(19.558,29.286) ; v1(36.043,16.815) 36.096,16.815 36.156,16.875 U9.90@41.393,16.875
  Bottom Layer w0.127: v1(19.558,29.286) 19.893,28.951 19.893,27.345 19.731,27.183 19.731,25.07 19.025,24.364 19.025,22.063 19.785,21.303 19.785,18.89 21.312,17.363 21.312,15.959 21.777,15.494 23.444,15.494 24.181,14.757 25.349,14.757 26.187,15.596 27.838,15.596 28.499,16.256 30.413,16.256 31.038,16.882 32.223,16.882 32.359,17.018 35.807,17.018 36.01,16.815 v1(36.043,16.815)
MCLK: U6.37 U9.29 | length 39.2
  Top Layer w0.254: U6.37@12.843,23.015 12.845,23.017 12.845,23.981 13.029,24.165 13.781,24.165 13.816,24.13 14.478,24.13 16.002,25.654 16.637,25.654 18.212,27.229 v1(18.618,27.229) ; U9.29@25.917,20.375 28.774,20.375 29.21,19.939 v1(29.21,15.113)
  Bottom Layer w0.127: v1(18.618,27.229) 18.678,27.229 19.043,26.863 19.043,25.528 18.344,24.829 18.344,21.661 19.077,20.928 19.077,18.448 20.574,16.951 20.574,15.621 21.463,14.732 23.243,14.732 23.899,14.076 25.76,14.076 26.543,14.859 28.876,14.859 29.13,15.113 v1(29.21,15.113)
MDC: U2.12 U9.16 | length 70.9
  Top Layer w0.203: U2.12@14.869,47.227 11.324,47.227 10.877,46.781 10.877,40.891 13.229,38.539 17.887,38.539 17.946,38.48 19.386,37.039 23.726,37.039 25.541,35.224 25.888,35.224 v1(26.289,34.823) ; U9.16@32.155,23.613 32.18,23.638 32.18,24.459 v1(32.436,24.714)
  Bottom Layer w0.203: v1(26.289,34.823) 26.289,38.227 26.924,38.862 29.337,38.862 30.353,37.846 30.353,32.631 30.472,32.512 41.191,32.512 42.164,31.539 42.164,29.548 41.191,28.575 34.544,28.575 33.782,27.813 33.782,24.457 33.663,24.339 32.641,24.339 32.483,24.496 32.483,24.667 v1(32.436,24.714)
MDIO: R11.1 U2.11 U9.25 | length 47.5
  Top Layer w0.203: v1(9.55,46.812) 9.575,46.787 10.492,46.787 ; U2.11@14.869,47.727 11.117,47.727 10.49,47.1 10.49,47.015 10.492,46.791 10.541,40.767 10.541,40.684 12.99,38.236 17.483,38.236 17.542,38.177 19.033,36.686 23.563,36.686 25.327,34.921 25.337,34.921 25.46,34.798 v1(25.527,34.798) 26.289,34.036 26.289,33.147 25.146,32.004 25.146,26.691 v1(24.881,26.427) ; U9.25@27.655,23.613 27.658,23.616 27.658,24.991 v1(27.661,24.994)
  Bottom Layer w0.203: v1(9.55,46.812) 11.735,46.812 11.872,46.675 R11.1@11.872,45.466
  Bottom Layer w0.254: v1(24.881,26.427) 27.04,26.427 27.661,25.806 v1(27.661,24.994)
NetC3_1: C3.1 U1.5 X1.2 | length 11.2
  Top Layer w0.254: X1.2@39.925,40.64 40.052,40.767 v1(43.815,40.767) 44.89,41.842 U1.5@44.89,44.657
  Bottom Layer w0.254: C3.1@40.925,40.64 41.052,40.767 v1(43.815,40.767)
NetC6_1: C6.1 U1.6 X1.1 | length 9.7
  Top Layer w0.254: U1.6@45.39,44.657 45.39,41.113 45.863,40.64 X1.1@46.101,40.64 ; v1(46.101,38.862) X1.1@46.101,40.64 ; X1.1@47.925,40.64 X1.1@46.101,40.64
  Bottom Layer w0.254: v1(46.101,38.862) 46.101,40.497 C6.1@46.117,40.513
NetC10_2: C10.2 U2.2 | length 6.1
  Top Layer w0.254: U2.2@18.517,49.55 18.517,49.609 18.515,49.611 18.515,49.973 18.917,50.375 21.203,50.375 21.457,50.629 21.457,51.264 21.605,51.412 23.234,51.412 C10.2@23.257,51.435
NetC11_2: C11.2 C12.2 C13.2 C14.2 FB1.2 U2.3 | length 9.2
  Bottom Layer w0.762: FB1.2@17.903,44.374 19.656,44.374 C11.2@20.494,45.212 20.438,45.268 20.438,47.316 C12.2@20.383,47.371 C13.2@20.383,49.403 20.375,49.411 20.375,51.411 C14.2@20.383,51.419
  other v1: 19.939,52.324 20.32,52.324 20.701,52.324
NetC15_2: C15.2 U2.8 Y1.2 | length 12.6
  Top Layer w0.132: U2.8@15.519,49.377 U2.8@15.519,49.552
  Top Layer w0.254: v1(6.35,45.974) Y1.2@6.35,48.88 ; Y1.2@6.397,49.911 15.16,49.911 15.16,49.907 15.519,49.548 U2.8@15.519,49.377
  Bottom Layer w0.254: C15.2@6.35,48.88 C15.2@6.397,48.927
NetC20_2: C20.2 U2.9 Y1.1 | length 16.8
  Top Layer w0.254: v1(8.128,43.561) 7.852,43.285 6.397,43.285 6.397,44.659 7.874,46.136 7.874,48.549 8.054,48.729 14.696,48.729 14.698,48.727 U2.9@14.869,48.727
  Bottom Layer w0.254: C20.2@6.397,44.18 6.905,43.672 7.964,43.672 8.075,43.561 v1(8.128,43.561)
NetC21_2: C21.2 R10.2 S.9 S.10 | length 0
  Top Layer w0.254: S.10@28.956,67.86 S.10@28.977,67.839
  other v1: 32.512,63.119
NetC22_1: C22.1 U3.3 | length 4.8
  Top Layer w0.254: C22.1@49.53,29.829 50.7,28.659 50.7,27.1 51.194,26.606 51.194,25.76 U3.3@51.217,25.737
NetC22_2: C22.2 U3.4 | length 2.6
  Top Layer w0.254: C22.2@49.53,27.829 50.346,27.013 50.346,26.953 50.694,26.605 50.694,25.76 U3.4@50.717,25.737
NetC23_1: C23.1 U3.2 | length 2.2
  Top Layer w0.254: C23.1@51.562,27.829 51.717,27.674 U3.2@51.717,25.737
NetC25_2: C25.2 R13.1 U3.7 | length 6.4
  Top Layer w0.254: R13.1@46.482,25.908 46.533,25.959 v1(47.752,25.959) 47.752,25.906 47.844,25.814 47.844,24.51 47.867,24.487 U3.7@48.467,24.487
  Bottom Layer w0.254: C25.2@46.314,27.889 46.327,27.876 47.181,27.876 47.714,27.343 47.714,25.996 v1(47.752,25.959)
NetC29_2: C29.2 FB2.2 U5.12 | length 17.1
  Top Layer w0.254: v1(7.214,31.775) 11.278,31.775 11.751,31.302 U5.12@11.751,29.972
  Bottom Layer w0.254: v1(7.214,31.775) 7.226,31.775 7.648,32.198 10.287,32.198 10.541,32.452 10.541,34.671 11.12,35.25 14.153,35.25 14.424,34.979 14.424,34.405 FB2.2@14.732,34.097
NetC30_1: C30.1 C31.1 R29.1 U5.10 | length 6.2
  Top Layer w0.254: R29.1@6.477,27.813 6.604,27.686 C31.1@8.382,27.686 ; C31.1@8.382,27.702 9.557,27.702 10.451,28.596 U5.10@10.451,30.404
NetC30_2: C30.2 C32.1 R28.1 U5.11 | length 9.8
  Top Layer w0.254: R28.1@6.54,26.162 7.62,26.162 8.255,26.797 C32.1@10.43,26.797 11.7,28.067 11.922,28.067 12.357,28.502 C30.2@12.43,28.575 11.448,28.575 11.299,28.724 11.299,29.681 11.101,29.879 U5.11@11.101,30.404
NetC34_1: C34.1 R30.2 | length 2
  Bottom Layer w0.254: R30.2@6.922,12.954 7.223,13.255 C34.1@7.223,14.859
NetC37_2: C37.2 C39.2 C40.1 FB3.2 U6.13 U6.16 | length 13.2
  Top Layer w0.127: v1(9.525,16.51) 9.091,16.51 8.636,16.055 8.636,15.025 9.437,14.224 12.153,14.224 12.593,14.664 12.593,16.07 12.343,16.32 U6.13@12.343,17.145
  Top Layer w0.254: U6.13@12.343,17.145 12.343,17.476 12.659,17.792 13.694,17.792 13.843,17.643 U6.16@13.843,17.145
  Bottom Layer w0.127: v1(9.525,16.51) 9.922,16.113 C39.2@10.922,16.113
NetC38_1: C38.1 U6.12 | length 1.8
  Top Layer w0.254: C38.1@11.795,15.367 11.843,15.415 U6.12@11.843,17.145
NetC38_2: C38.2 U6.11 | length 2.5
  Top Layer w0.254: C38.2@9.795,15.367 11.28,16.852 11.341,16.852 11.343,16.854 U6.11@11.343,17.145
NetC41_2: C41.2 U6.10 | length 2.4
  Top Layer w0.254: v1(9.652,17.526) 9.956,17.83 U6.10@10.658,17.83
  Bottom Layer w0.254: C41.2@8.509,17.796 9.382,17.796 v1(9.652,17.526)
NetC48_1: C48.1 U6.27 | length 2
  Top Layer w0.254: U6.27@16.528,20.83 17.762,20.83 C48.1@18.288,20.304
NetC49_1: C49.1 U6.28 | length 2.9
  Top Layer w0.254: U6.28@16.528,21.33 18.028,21.33 18.288,21.59 C49.1@18.288,22.622
NetC50_1: C50.1 U6.19 | length 3.3
  Top Layer w0.254: U6.19@15.353,17.145 15.353,16.524 v1(15.748,16.129)
  Bottom Layer w0.381: C50.1@14.967,14.326 14.967,15.348 v1(15.748,16.129)
NetC51_1: C51.1 U6.18 | length 2.8
  Top Layer w0.254: U6.18@14.853,17.145 14.853,14.416 C51.1@14.923,14.346
NetC52_1: C52.1 U8.3 | length 4.5
  Top Layer w0.254: C52.1@53.086,17.764 54.272,16.578 U8.3@54.272,13.803
NetC52_2: C52.2 U8.4 | length 2.2
  Top Layer w0.254: C52.2@53.086,15.764 53.772,15.078 U8.4@53.772,13.803
NetC53_1: C53.1 U8.2 | length 3
  Top Layer w0.254: U8.2@54.772,13.803 54.772,16.211 C53.1@55.198,16.637
NetC55_2: C55.2 R34.1 U8.7 | length 4.6
  Top Layer w0.254: v1(49.53,14.224) 50.711,14.224 R34.1@50.876,14.059 51.522,13.413 U8.7@51.522,12.553
  Bottom Layer w0.254: v1(49.53,14.224) 50.911,14.224 C55.2@50.927,14.24
NetC66_2: C66.2 U9.73 | length 4.3
  Top Layer w0.254: v1(37.592,10.414) 38.151,10.414 38.655,9.91 U9.73@38.655,8.137
  Bottom Layer w0.254: C66.2@36.322,10.43 36.338,10.414 v1(37.592,10.414)
NetC67_2: C67.2 U9.49 | length 4.6
  Top Layer w0.254: v1(24.333,9.398) 24.371,9.436 24.371,9.967 24.779,10.375 U9.49@25.917,10.375
  Bottom Layer w0.254: v1(24.333,9.398) 24.371,9.436 24.371,9.967 24.691,10.287 25.892,10.287 C67.2@25.908,10.303
NetC68_2: C68.2 C69.2 C70.2 C71.2 FB4.2 U9.21 U9.22 | length 7.1
  Top Layer w0.254: U9.22@29.155,23.613 29.155,26.816 29.337,26.998 v1(29.337,27.051) ; U9.21@29.655,23.613 29.655,26.681 29.972,26.998 v1(29.972,27.051)
NetC73_1: C73.1 U9.12 X2.2 | length 7.6
  Top Layer w0.254: U9.12@34.155,23.613 34.155,28.821 v1(35.001,29.667) ; v1(37.719,31.75) 37.719,30.623 C73.1@37.735,30.607
  other v1: 34.976,30.429 34.95,31.166
NetC74_1: C74.1 U9.13 X2.1 | length 8.8
  Top Layer w0.254: C74.1@31.48,30.607 31.632,30.455 v1(34.011,30.455) ; U9.13@33.655,23.613 33.655,29.284 34.011,29.64 v1(34.011,29.693)
  other v1: 33.985,31.166
NetC81_2: C81.2 C82.2 C83.2 D5.K U10.3
NetC87_2: C87.2 C88.2 C89.2 D7.K U11.3
  other v1: 62.789,1.063 62.789,1.825 62.789,2.587
NetC91_1: C91.1 R31.2 | length 3.1
  Bottom Layer w0.254: R31.2@12.319,9.207 15.32,9.207 C91.1@15.367,9.16
NetDS1_K: DS1.K R5.1 | length 3.8
  Top Layer w0.254: DS1.K@24.562,43.028 24.968,43.434 v1(26.035,43.434)
  Bottom Layer w0.254: v1(26.035,43.434) 27.051,44.45 R5.1@27.813,44.45
NetDS2_K: DS2.K R7.1 | length 3
  Top Layer w0.254: DS2.K@24.562,45.11 24.663,45.212 v1(26.035,45.212)
  Bottom Layer w0.254: v1(26.035,45.212) 26.416,45.593 R7.1@27.369,45.593
NetJ7_2: J7.2 R31.1 U6.15 | length 9.9
  Top Layer w0.254: U6.15@13.353,17.145 13.353,13.988 12.558,13.193 12.558,11.948 12.548,11.938 12.751,11.735 13.993,11.735 14.044,11.684 v1(14.097,11.684)
  Bottom Layer w0.254: R31.1@12.319,10.604 12.319,11.43 12.573,11.684 v1(14.097,11.684)
NetJ7_3: J7.3 R30.1 U6.14 | length 15.4
  Top Layer w0.254: v1(6.35,11.303) 6.35,13.589 ; J7.3@6.375,14.911 6.35,14.886 6.35,13.589 ; U6.14@12.853,17.145 12.853,16.221 12.884,16.19 12.884,14.154 12.319,13.589 6.35,13.589
  Bottom Layer w0.254: R30.1@5.525,12.954 5.525,12.128 v1(6.35,11.303)
NetR3_1: R3.1 U1.44 | length 2
  Top Layer w0.254: R3.1@39.611,47.625 40.131,48.145 U1.44@41.402,48.145
NetR4_1: R4.1 U1.20 | length 2
  Top Layer w0.254: U1.20@49.878,49.645 51.74,49.645 R4.1@51.816,49.721
NetR9_1: R9.1 U2.1 | length 4
  Top Layer w0.203: R9.1@22.505,49.377 22.531,49.403 R9.1@22.992,49.403
  Top Layer w0.254: U2.1@19.019,49.377 R9.1@22.505,49.377
NetR12_2: R12.2 U2.10 | length 4.9
  Top Layer w0.203: v1(12.446,48.26) 12.479,48.227 U2.10@14.869,48.227
  Bottom Layer w0.203: R12.2@10.033,48.072 10.221,48.26 v1(12.446,48.26)
NetR13_2: R13.2 R14.1 U3.6 | length 6
  Top Layer w0.254: R14.1@46.482,29.02 R13.2@46.482,27.305 48.006,27.305 48.951,26.36 49.694,26.36 49.717,26.337 U3.6@49.717,25.737
NetR18_2: R18.2 U3.12 | length 4.4
  Top Layer w0.254: v1(48.467,20.469) U3.12@48.467,21.987
  Bottom Layer w0.254: R18.2@46.082,21.59 47.346,21.59 v1(48.467,20.469)
NetR21_2: R21.2 U3.13 | length 3.9
  Top Layer w0.254: R21.2@46.8,19.304 47.916,19.304 48.321,19.709 49.289,19.709 49.694,20.114 49.694,20.714 U3.13@49.717,20.737
NetR33_2: R33.2 U7.2 | length 2.9
  Top Layer w0.254: R33.2@8.509,2.349 9.187,1.671 10.299,1.671 10.726,2.098 U7.2@10.726,2.373
NetR34_2: R34.2 R35.1 U8.6 | length 4.5
  Top Layer w0.254: R34.2@50.851,15.481 R35.1@50.851,17.005 ; R34.2@50.876,15.456 51.719,15.456 52.772,14.403 U8.6@52.772,13.803
NetR39_2: R39.2 U8.12 | length 4.5
  Top Layer w0.254: v1(50.635,8.674) 50.635,9.868 50.797,10.03 51.499,10.03 U8.12@51.522,10.053
  Bottom Layer w0.254: R39.2@49.464,10.033 49.464,8.956 49.746,8.674 v1(50.635,8.674)
NetR42_2: R42.2 U8.13 | length 3.5
  Top Layer w0.254: U8.13@52.772,8.803 52.772,5.585 R42.2@52.959,5.398
NetR47_2: R47.2 U9.37 | length 6.4
  Top Layer w0.254: v1(24.511,15.494) 24.549,15.532 24.549,15.786 25.138,16.375 U9.37@25.917,16.375
  Bottom Layer w0.254: v1(24.511,15.494) 25.375,16.358 27.47,16.358 R47.2@28.257,17.145
NetR48_2: R48.2 U9.94 | length 6.3
  Top Layer w0.254: U9.94@41.393,18.875 v1(42.445,18.875)
  Bottom Layer w0.254: R48.2@39.243,17.145 42.418,17.145 42.799,17.526 42.799,18.468 42.445,18.822 v1(42.445,18.875)
NetU1_25: U1.25 U1.27 U9.72 | length 81.6
  Top Layer w0.254: U9.72@38.155,8.137 38.155,9.212 36.043,11.324 36.043,14.478 34.798,15.723 32.354,15.723 31.242,16.835 31.242,18.491 31.955,19.204 36.932,19.204 41.91,24.182 41.91,32.36 v1(42.951,33.401) ; v1(46.279,33.535) 46.316,33.497 46.439,33.497 46.464,33.472 51.76,33.472 53.594,35.306 53.594,47.244 55.626,49.276 55.626,54.61 54.991,55.245 48.895,55.245 48.39,54.74 U1.25@48.39,53.133 48.367,53.11 48.367,52.177 48.133,51.943 47.647,51.943 47.371,52.219 47.371,53.114 U1.27@47.39,53.133
  Bottom Layer w0.254: v1(42.951,33.401) 43.429,33.878 45.882,33.878 46.226,33.535 v1(46.279,33.535)
nFAULT: R23.1 U3.9 U9.62 | length 30.2
  Top Layer w0.127: U9.62@33.155,8.137 33.155,9.7 33.325,9.869 v1(33.325,9.957)
  Top Layer w0.254: v1(43.485,9.779) 43.522,9.817 43.522,14.044 44.245,14.766 44.245,20.471 44.728,20.953 44.728,22.376 R23.1@45.466,23.114 46.639,23.114 47.012,23.487 U3.9@48.467,23.487
  Bottom Layer w0.254: v1(33.325,9.957) 34.461,8.821 42.526,8.821 v1(43.485,9.779)
nFAULT_2: R44.1 U8.9 U9.59 | length 26.1
  Top Layer w0.127: U9.59@31.655,8.137 31.682,8.11 31.682,7.117 v1(31.709,7.09) ; v1(36.489,5.624) 36.561,5.624 36.765,5.827 47.204,5.827 48.731,7.355 48.731,10.949 49.335,11.553 R44.1@49.343,11.553
  Top Layer w0.254: R44.1@49.343,11.553 U8.9@51.522,11.553
  Bottom Layer w0.127: v1(31.709,7.09) 33.129,5.67 36.443,5.67 v1(36.489,5.624)
NJTRST_F103: J2.1 U1.40 | length 16.3
  Top Layer w0.254: J2.1@33.575,38.989 33.968,39.382 33.968,39.937 35.156,41.125 35.156,45.062 37.211,47.117 37.211,49.276 38.08,50.145 U1.40@41.402,50.145
NRST: R1.1 SW1.2 U1.7 | length 20.6
  Top Layer w0.254: U1.7@45.89,44.657 45.913,44.634 45.913,43.71 46.062,43.561 51.435,43.561 51.943,43.053 51.943,35.179 51.628,34.864 R1.1@50.212,34.864 48.956,34.864 48.26,35.56 SW1.2@46.91,35.56
NTRST_F407: C59.2 R46.1 SW3.2 U1.26 U9.14 | length 95.9
  Top Layer w0.254: SW3.2@21.387,25.146 21.412,25.171 v1(22.758,25.171) 22.746,25.184 22.746,27.546 v1(22.733,27.559) ; U9.14@33.155,23.613 v1@33.155,24.748 ; v1(35.687,24.765) 35.714,24.792 35.714,28.221 v1(36.576,29.083) ; v1(46.293,32.985) 46.298,32.98 51.776,32.98 54.102,35.306 54.102,47.251 56.083,49.233 56.083,54.915 55.245,55.753 48.641,55.753 47.89,55.002 U1.26@47.89,53.133
  Bottom Layer w0.254: R46.1@20.955,28.766 22.685,28.766 C59.2@22.733,28.718 v1(22.733,27.559) ; v1(22.758,25.171) 25.527,27.94 32.156,27.94 33.172,26.924 ; v1(33.172,24.765) 33.172,26.924 ; v1(35.687,24.765) 38.989,24.765 43.688,29.464 43.688,31.75 42.164,33.274 42.164,34.29 42.418,34.544 47.752,34.544 48.133,34.163 48.133,33.274 47.844,32.985 v1(46.293,32.985) ; v1(36.576,29.083) 34.417,29.083 33.172,27.838 33.172,26.924
OUTA+: J12.1 U6.4 | length 10.2
  Top Layer w0.254: J12.1@2.286,25.298 2.931,25.298 3.404,24.825 4.854,24.825 8.849,20.83 U6.4@10.658,20.83
OUTA-: J12.2 U6.6 | length 9.6
  Top Layer w0.254: J12.2@2.286,22.758 2.428,22.616 3.673,22.616 6.459,19.83 U6.6@10.658,19.83
OUTB+: J12.3 U6.7 | length 8.7
  Top Layer w0.254: J12.3@2.286,20.218 2.936,20.218 3.824,19.33 U6.7@10.658,19.33
OUTB-: J12.4 U6.9 | length 8.6
  Top Layer w0.254: J12.4@2.286,17.678 3.02,17.678 3.672,18.33 U6.9@10.658,18.33
PH: U3.15 U9.63 | length 27.7
  Top Layer w0.254: U9.63@33.655,8.137 33.655,7.241 33.757,7.14 v1(33.757,7.087) ; v1(43.328,7.006) 44.953,8.631 44.953,12.695 49.403,17.145 49.403,18.542 50.694,19.833 50.694,20.11 50.717,20.133 U3.15@50.717,20.733
  Bottom Layer w0.127: v1(33.757,7.087) 33.77,7.087 34.156,6.701 40.864,6.701 41.169,7.006 v1(43.328,7.006)